# Altium PCB jsduino.PcbDoc
Units mm, origin at the board's own origin, x right, y up, seen from the top; angles counter-clockwise.
Board outline 102.23 x 53.34 mm, 2 copper layers (Top Layer, Bottom Layer); 61 components, 70 nets, 259 pads, 119 vias.
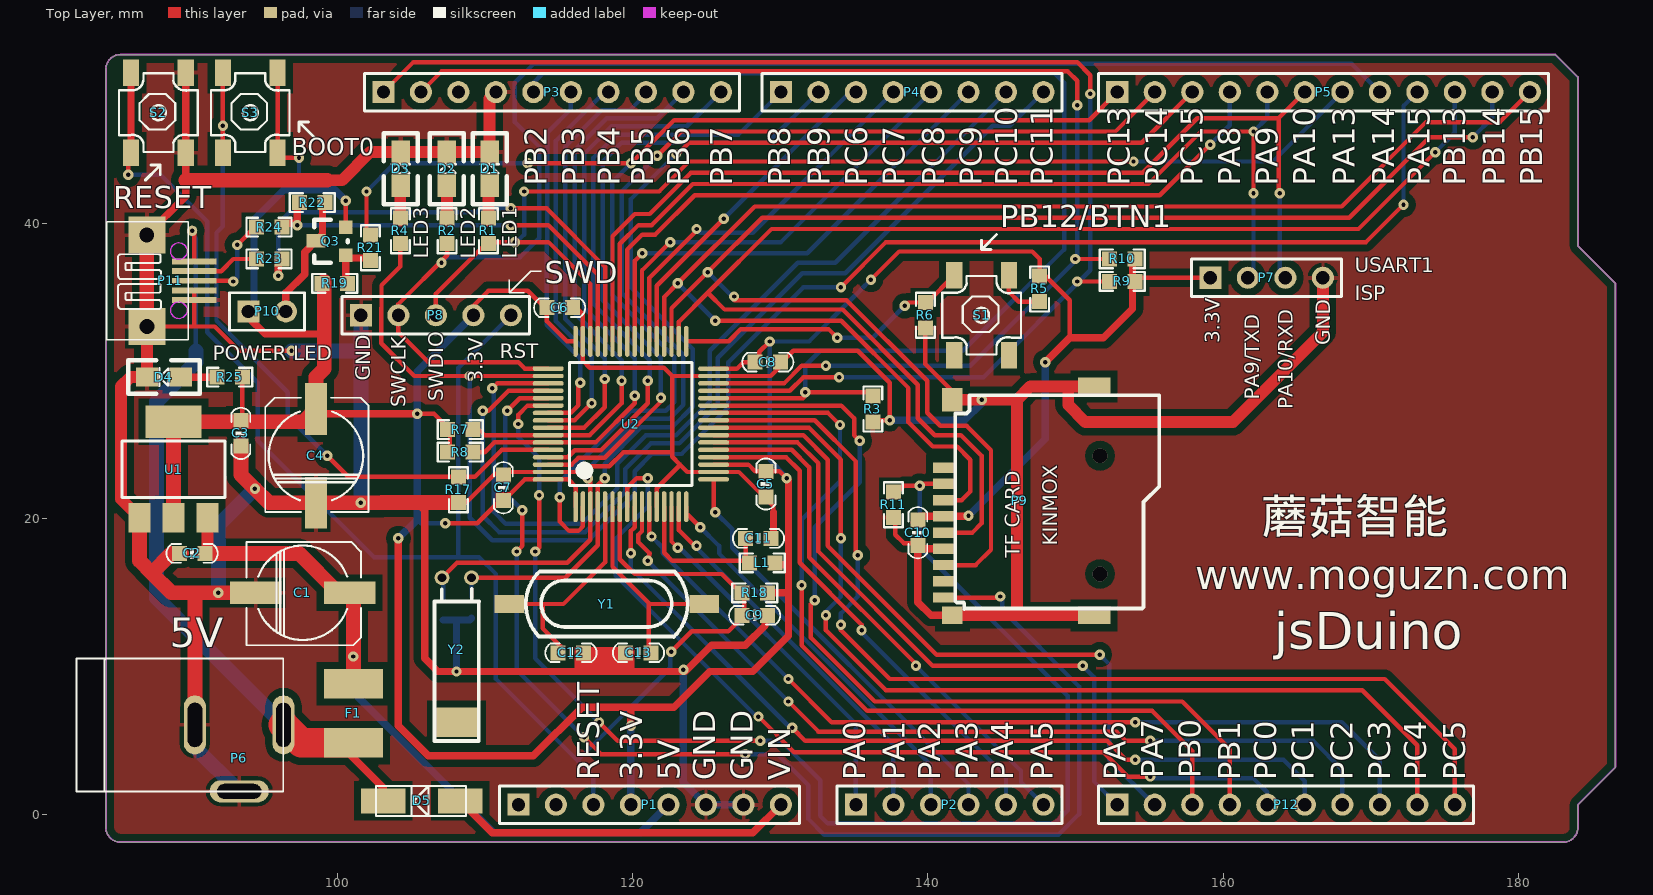
[diagram p0: Top Layer view]
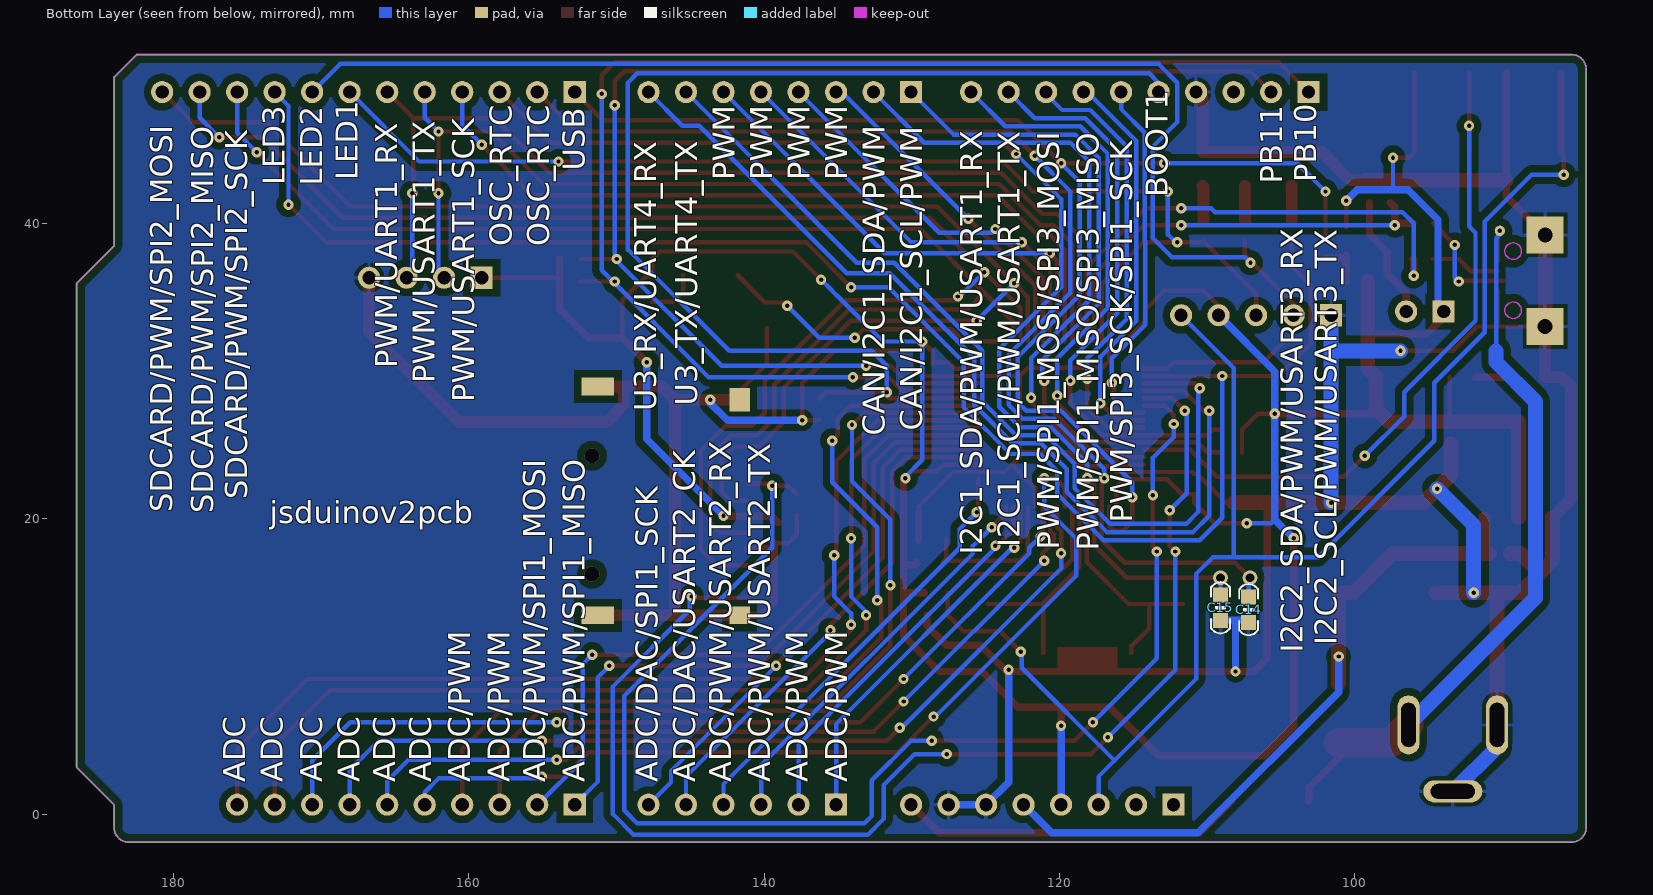
[diagram p1: Bottom Layer view, seen from below]

## Layer stack, top to bottom
Top Layer: signal copper 0.0356
Dielectric: dielectric 0.32, FR-4, Dk 4.8
Bottom Layer: signal copper 0.0356

## Board outline
84.328,-0.914 84.328,50.444 cw(c85.319,50.444) 85.319,51.435 182.499,51.435 184.023,49.911 184.023,38.481 186.563,35.941 186.563,3.175 184.023,0.635 184.023,-0.914 cw(c183.032,-0.914) 183.032,-1.905 85.319,-1.905 cw(c85.319,-0.914)

## Design rules (kind name [scope] priority, off if disabled: settings)
Clearance [All] p1: gap=0.5
PolygonConnect [All] p1: connectstyle=Relief reliefconductorwidth=0.254 reliefentries=4 polygonreliefangle="90 Angle" airgapwidth=0.254
RoutingVias [All] p1: holewidth=0.711 width=1.27 viastyle="Through Hole" minholewidth=0.711 minwidth=1.27 maxholewidth=0.711 maxwidth=1.27
SilkToSolderMaskClearance SilkscreenOverComponentPads [IsPad] p1: minsilkscreentomaskgap=0.254 clearancetoexposedcopper=TRUE
SolderMaskExpansion [All] p1: expansion=0.102
Width [All] p1: maxlimit=2 minlimit=0.254 preferedwidth=0.254 minimp=50.000000 maximp=50.000000 favimp=50.000000
27 further rules are at their usual default settings.

## Components (designator, comment, footprint, x,y, rotation, side; value= is the part's Value field where it differs from the comment)
C1 "1000uf" c6.3*5.3 97.663,14.986 r0 top
C2 "104" 0603CC 90.17,17.653 r180 top
C3 "104" 0603CC 93.472,25.781 r270 top
C4 "1000uf" c6.3*5.3 98.552,24.257 r90 top
C5 "Cap" 0603CC 129.032,22.352 r90 top
C6 "Cap" 0603CC 115.062,34.29 r180 top
C7 "Cap" 0603CC 111.252,22.098 r270 top
C8 "Cap" 0603CC 129.159,30.607 r180 top
C9 "Cap" 0603CC 128.27,13.462 r180 top
C10 "100nF" 0603CC 139.319,19.05 r90 top
C11 "Cap" 0603CC 128.524,18.669 r180 top
C12 "Cap" 0603CC 115.824,10.922 r0 top
C13 "Cap" 0603CC 120.396,10.922 r180 top
C14 "Cap" 0603CC 107.188,13.843 r270 bottom
C15 "Cap" 0603CC 109.093,13.97 r270 bottom
D1 "LED1" 0805LED 110.319,44.844 r270 top
D2 "LED1" 0805LED 107.423,44.844 r270 top
D3 "LED1" 0805LED 104.299,44.844 r270 top
D4 "LED1" 0805LED 87.122,29.591 r0 top
D5 "IN4007" DIODE_SS14 105.791,0.889 r0 top
F1 "500ma 5X5 1812" 1812R 101.092,4.826 r90 top
L1 "Inductor" 0603RR 128.778,17.018 r180 top
P1 "Header 8" HDR1X8 112.268,0.635 r0 top
P2 "Header 6" HDR1X6 135.128,0.635 r0 top
P3 "Header 10" HDR1X10 103.124,48.895 r0 top
P4 "Header 8" HDR1X8 130.048,48.895 r0 top
P5 "Header 12" HDR1X12 152.828,48.895 r0 top
P6 "Header 2" 5VINPUT 93.345,1.524 r180 top (schematic designator P2)
P7 "Header 4" HDR1X4 159.131,36.322 r0 top
P8 "SWD" HDR1X5 101.6,33.782 r0 top
P9 "microSD PUSH-PULL" TFCARD3 151.257,13.462 r90 top
P10 "Header 2" HDR1X2 93.98,34.036 r0 top
P11 "USBHOST" USB_mini 87.122,33.02 r90 top (schematic designator P1)
P12 "Header 10" HDR1X10 152.828,0.635 r0 top
Q3 "S9012" SOT-23 100.584,37.846 r90 top
R1 "1k" 0603RR 110.236,39.497 r270 top
R2 "1k" 0603RR 107.442,39.497 r270 top
R3 "Res2" 0603RR 136.271,27.432 r90 top
R4 "1k" 0603RR 104.267,39.497 r270 top
R5 "10K" 0603RR 147.574,35.56 r270 top
R6 "100K" 0603RR 139.827,33.782 r90 top
R7 "Res Semi" 0603RR 108.331,26.035 r0 top
R8 "Res Semi" 0603RR 108.331,24.511 r0 top
R9 "Res Semi" 0603RR 153.162,36.068 r180 top
R10 "Res Semi" 0603RR 153.162,37.592 r180 top
R11 "Res Semi" 0603RR 137.668,20.955 r270 top
R17 "Res2" 0603RR 108.204,21.971 r270 top
R18 "Res2" 0603RR 128.27,14.986 r180 top
R19 "Res Semi" 0603RR 99.822,35.941 r180 top
R21 "Res Semi" 0603RR 102.235,38.354 r270 top
R22 "Res Semi" 0603RR 98.298,41.402 r180 top
R23 "Res Semi" 0603RR 95.377,37.592 r0 top
R24 "Res Semi" 0603RR 95.377,39.751 r0 top
R25 "1k" 0603RR 92.71,29.591 r0 top
S1 "SW-PB" KEY_5*5*X 143.637,33.782 r90 top
S2 "SW-PB" KEY_5*5*X 87.884,47.498 r90 top
S3 "SW-PB" KEY_5*5*X 94.107,47.498 r90 top
U1 "SP1117" SOT-223 88.9,26.543 r0 top
U2 "STM32F103RBT6" LQFP64_M 119.888,26.416 r90 top
Y1 "8M" XTAL_smd1 118.237,14.224 r0 top
Y2 "32768" XTAL_32768_HH 108.077,16.002 r270 top

## Footprints (in the part's own frame and the unit in brackets; to place one, negate y for a bottom-side part, rotate by r counter-clockwise, add the part's x,y. Pads: shape width x height; smd on the part's side, far side on the other; paste and mask are expansions set on the pad)
5VINPUT [mm]
  oval 1.5x4 hole 1 slot 3 at 90 deg: 1(-3.013,-4.513) 2(2.987,-4.513)
  oval 4x1.5 hole 1 slot 3 at 0 deg: 3(-0.013,-0.013)
  silkscreen extent -3,-9 11,0
0603CC [mil]
  rect 40x40 smd: 1(-34,0) 2(34,0)
  silkscreen extent -68,-25 68,25
0603RR [mil]
  rect 40x40 smd: 1(-34,0) 2(34,0)
  silkscreen extent -60,-25 60,25
0805LED [mil]
  rect 60x50 smd: 1(90,0) 2(0,0)
  silkscreen extent -50,-45 140,45
1812R [mm]
  rect 2x4 smd: 1(0,0) 2(4,0)
c6.3*5.3 [mm]
  rect 3.5x1.5 smd: 1(3.175,0) 2(-3.175,0)
  silkscreen extent -3.81,-3.56 3.94,3.43
DIODE_SS14 [mm]
  rect 3x1.7 smd: 1(2.54,0) 2(-2.667,0)
  silkscreen extent -3.17,-1.02 2.92,1.02
HDR1X2 [mm] "Connector; Header; 2 Position"
  rect 1.5x1.5 hole 0.9: 1(0,0)
  round 1.5 hole 0.9: 2(2.54,0)
  silkscreen extent -1.27,-1.27 3.81,1.27
HDR1X4 [mm] "Connector; Header; 4 Position"
  rect 1.5x1.5 hole 0.9: 1(0,0)
  round 1.5 hole 0.9: 2(2.54,0) 3(5.08,0) 4(7.62,0)
  silkscreen extent -1.27,-1.27 8.89,1.27
HDR1X5 [mm] "Connector; Header; 5 Position"
  rect 1.5x1.5 hole 0.9: 1(0,0)
  round 1.5 hole 0.9: 2(2.54,0) 3(5.08,0) 4(7.62,0) 5(10.16,0)
  silkscreen extent -1.27,-1.27 11.43,1.27
HDR1X6 [mm] "Connector; Header; 6 Position"
  rect 1.5x1.5 hole 0.9: 1(0,0)
  round 1.5 hole 0.9: 2(2.54,0) 3(5.08,0) 4(7.62,0) 5(10.16,0) 6(12.7,0)
  silkscreen extent -1.27,-1.27 13.97,1.27
HDR1X8 [mm] "Connector; Header; 8 Position"
  rect 1.5x1.5 hole 0.9: 1(0,0)
  round 1.5 hole 0.9: 2(2.54,0) 3(5.08,0) 4(7.62,0) 5(10.16,0) 6(12.7,0) 7(15.24,0) 8(17.78,0)
  silkscreen extent -1.27,-1.27 19.05,1.27
HDR1X10 [mm] "Connector; Header; 10 Position"
  rect 1.5x1.5 hole 0.9: 1(0,0)
  round 1.5 hole 0.9: 2(2.54,0) 3(5.08,0) 4(7.62,0) 5(10.16,0) 6(12.7,0) 7(15.24,0) 8(17.78,0) 9(20.32,0) 10(22.86,0)
  silkscreen extent -1.27,-1.27 24.13,1.27
HDR1X12 [mm] "Connector; Header; 12 Position"
  rect 1.5x1.5 hole 0.9: 1(0,0)
  round 1.5 hole 0.9: 2(2.54,0) 3(5.08,0) 4(7.62,0) 5(10.16,0) 6(12.7,0) 7(15.24,0) 8(17.78,0) 9(20.32,0) 10(22.86,0) 11(25.4,0) 12(27.94,0)
  silkscreen extent -1.27,-1.27 29.21,1.27
KEY_5*5*X [mm]
  rect 1.8x1.1 smd: 1(-2.7,1.85) 1(2.7,1.85) 2(-2.7,-1.85) 2(2.7,-1.85)
  silkscreen extent -2.67,-2.67 2.67,2.67
LQFP64_M [mm]
  oval 2.1x0.3 smd: 1(-5.6,3.75) 2(-5.6,3.25) 3(-5.6,2.75) 4(-5.6,2.25) 5(-5.6,1.75) 6(-5.6,1.25) 7(-5.6,0.75) 8(-5.6,0.25) 9(-5.6,-0.25) 10(-5.6,-0.75) 11(-5.6,-1.25) 12(-5.6,-1.75) 13(-5.6,-2.25) 14(-5.6,-2.75) 15(-5.6,-3.25) 16(-5.6,-3.75) 33(5.6,-3.75) 34(5.6,-3.25) 35(5.6,-2.75) 36(5.6,-2.25) 37(5.6,-1.75) 38(5.6,-1.25) 39(5.6,-0.75) 40(5.6,-0.25) 41(5.6,0.25) 42(5.6,0.75) 43(5.6,1.25) 44(5.6,1.75) 45(5.6,2.25) 46(5.6,2.75) 47(5.6,3.25) 48(5.6,3.75)
  oval 0.3x2.1 smd: 17(-3.75,-5.6) 18(-3.25,-5.6) 19(-2.75,-5.6) 20(-2.25,-5.6) 21(-1.75,-5.6) 22(-1.25,-5.6) 23(-0.75,-5.6) 24(-0.25,-5.6) 25(0.25,-5.6) 26(0.75,-5.6) 27(1.25,-5.6) 28(1.75,-5.6) 29(2.25,-5.6) 30(2.75,-5.6) 31(3.25,-5.6) 32(3.75,-5.6) 49(3.75,5.6) 50(3.25,5.6) 51(2.75,5.6) 52(2.25,5.6) 53(1.75,5.6) 54(1.25,5.6) 55(0.75,5.6) 56(0.25,5.6) 57(-0.25,5.6) 58(-0.75,5.6) 59(-1.25,5.6) 60(-1.75,5.6) 61(-2.25,5.6) 62(-2.75,5.6) 63(-3.25,5.6) 64(-3.75,5.6)
  silkscreen extent -4.15,-4.15 4.15,4.15
SOT-23 [mil]
  rect 36x36 smd: 1(0,0) 2(75,0)
  rect 36x50 smd: 3(38,80)
  silkscreen extent -20,-5 95,85
SOT-223 [mm]
  rect 1.5x2 smd: 1(-2.289,-6.468) 2(0.011,-6.468) 3(2.311,-6.468)
  rect 3.8x2.2 smd: 2(0.011,0.032)
  silkscreen extent -3.49,-5.12 3.51,-1.27
TFCARD3 [mm]
  rect 0.7x1.6 smd: 1(10,10.1) 2(8.9,10.1) 3(7.8,10.1) 4(6.7,10.1) 5(5.6,10.1) 6(4.5,10.1) 7(3.4,10.1) 8(2.3,10.1) 9(1.2,10.1)
  rect 1.2x1.4 all layers, no hole: 10(0,9.6)
  rect 1.2x2.2 all layers, no hole: 10(0,0) 10(15.5,0)
  rect 1.6x1.4 all layers, no hole: 10(14.6,9.6)
  silkscreen extent 0.41,-4.42 14.9,9.4
USB_mini [mm]
  rect 0.4x3 smd: 1(4.4,-3.187) 2(3.75,-3.187) 3(3.1,-3.187) 4(2.45,-3.187) 5(1.8,-3.187)
  rect 2.5x2.5 hole 1: 5(0,0) 5(6.2,0.02)
  Keep-Out Layer circle w0.1: c1.1,-2.15 r0.56
  Keep-Out Layer circle w0.1: c5.1,-2.15 r0.563
  silkscreen extent -0.91,-2.79 7.1,2.75
XTAL_32768_HH [mm]
  round 1 hole 0.6: 1(0,-0.984) 2(0,1.016)
  rect 2x3 smd: 3(9.779,0)
  silkscreen extent 0.76,-1.48 11.05,1.52
XTAL_smd1 [mm]
  rect 2x1.2 smd: 1(-6.604,0) 2(6.604,0)
  silkscreen extent -5.47,-2.22 5.49,2.22

## Part data
C1 C4: library part "CAPACITOR POL", "Capacitor"
C2 C3: library part CAP, "Capacitor"
C5 C6 C7 C8 C9 C11 C12 C13 C14 C15: "Capacitor"
C10: library part CAP
D1 D2 D3 D4: library part LED
D5: library part Diode, "Default Diode"
F1: library part "Fuse 2", "Fuse"
P1 P4: "Header, 8-Pin"
P2: "Header, 6-Pin"
P3 P12: "Header, 10-Pin"
P5: "Header, 12-Pin"
P6 P10: "Header, 2-Pin"
P7: "Header, 4-Pin"
P8 P11: library part "Header 5", "Header, 5-Pin"
Q3: "PNP General Purpose Amplifier"
R1 R2 R4 R5 R6 R25: library part RES1
R3 R17 R18: "Resistor"
R7 R8 R9 R10 R11 R19 R21 R22 R23 R24: "Semiconductor Resistor"
U2: "STM32 ARM-based 32-bit MCU with 128 Kbytes Flash, 64-pin LQFP, Industrial Temperature"
Y1 Y2: library part XTAL, "Crystal Oscillator"

## Free pads (board coordinates)
  round 0.7 hole 0.3: 0(90.17,39.497)

## Via types
v1: diameter 0.7, hole 0.3, Top Layer to Bottom Layer, 117 vias
v2: diameter 1, hole 1, Top Layer to Bottom Layer, 2 vias

## Nets (pads, with @x,y where several pads share a name; then routed paths per layer and width w, separated by ;. In a path a pad name is that pad's centre, name@x,y a point inside that pad or via, vN(x,y) a via of type N, cw(c..) or ccw(c..) an arc to the next point about the centre after c; other vN are vias at no path point)
+3.3V: C3.1 C4.1 C5.2 C6.2 C7.2 C8.2 C10.2 L1.1 P1.4 P7.1 P8.4 P9.4 P10.1 Q3.2 R5.1 R7.1 R8.1 R9.1 R10.1 R18.1 R19.2 R25.2 S3.2 U1.2 U2.1 U2.19 U2.32 U2.48 U2.64 | length 254.8
  Top Layer w0.3: C3.1 93.574,26.746 R25.2 ; S3.2@95.957,50.198 95.957,44.798 96.305,44.45 v1(97.409,44.45) ; Q3.2 v1(100.584,41.529) v1@100.584,41.656 ; v1(105.41,27.114) 106.553,27.114 107.632,26.035 R8.1@107.632,24.511 ; v1(107.315,19.685) 109.474,19.685 110.871,21.082 110.871,21.653 111.697,21.653 112.709,22.666 U2.64 115.637,22.666 116.138,22.165 U2.1 ; P8.4 109.22,34.417 110.236,35.433 112.903,35.433 114.198,34.138 114.198,33.376 115.558,32.016 U2.48 ; U2.19 127.845,23.666 128.295,23.216 129.946,23.216 v1(130.429,22.733) ; U2.32 127.067,30.166 127.508,30.607 C8.2 ; C8.2@128.588,30.48 128.588,31.305 v1(129.286,32.004) ; v1(136.144,36.195) 138.049,38.1 147.066,38.1 147.574,37.592 R5.1 147.98,36.424 149.606,34.798 149.606,32.258 ; R9.1@153.861,36.068 154.114,36.322 P7.1
  Top Layer w0.5: P10.1 93.98,33.655 95.123,32.512 99.123,32.512 ; C4.1 98.87,27.114 v1(105.41,27.114) ; v1(104.14,18.669) 104.14,5.969 106.172,3.937 113.284,3.937 116.586,7.239 119.888,7.239 ; P1.4 P1.4@119.888,1.143 ; v1(119.888,5.969) 119.888,7.239 ; R18.1 130.556,14.986 ; L1.1 129.769,16.891 130.556,16.891 ; v1(130.429,22.733) 130.556,22.606 130.556,16.891 ; C10.2@139.065,19.748 139.478,20.162 P9.4 142.717,20.162 v1(142.748,20.193) ; v1(147.955,30.607) 149.606,32.258 151.892,32.258 153.861,34.227 153.861,36.068 R10.1@153.861,37.592 ; 119.888,7.239 122.809,7.239 125.222,9.652 128.143,9.652 130.556,12.065 130.556,14.986 ; 130.556,14.986 130.556,16.891
  Top Layer w1: U1.2@88.911,20.075 88.911,26.575 97.695,26.575 C4.1 98.552,29.591 99.123,30.162 99.123,32.512 R19.2@99.123,36.068
  Bottom Layer w0.3: 97.409,42.291 v1(97.409,44.45) ; 105.41,19.939 105.664,19.685 v1(107.315,19.685) ; v1(130.429,22.733) 130.429,22.86 129.286,24.003 v1(129.286,32.004) 131.953,32.004 135.082,35.133 135.103,35.133 135.428,35.458 135.428,35.479 v1(136.144,36.195)
  Bottom Layer w0.5: P10.1 94.361,34.417 94.361,40.259 96.393,42.291 97.409,42.291 99.822,42.291 v1(100.584,41.529) ; v1(104.14,18.669) 105.41,19.939 v1(105.41,27.114) 105.41,29.972 P8.4 ; P1.4 v1(119.888,5.969) ; v1(142.748,20.193) 147.955,25.4 v1(147.955,30.607)
+5V: C1.1 C2.1 F1.2 P1.5 U1.3 | length 48.4
  Top Layer w0.8: C2.1@90.868,17.653 91.211,17.996 U1.3
  Top Layer w1: C2.1@90.868,17.653 97.409,17.653 100.076,14.986 C1.1 101.092,14.732 v1(101.092,10.668) F1.2
  Bottom Layer w0.5: v1(101.092,10.668) 101.092,8.255 110.617,-1.27 120.523,-1.27 P1.5
AREF: P3.3
BOOT0: R17.1 S3.1 U2.60 | length 47.4
  Top Layer w0.3: S3.1@92.257,44.798 v1(92.257,46.609) S3.1@92.257,50.198 ; v1(99.314,24.257) 100.736,22.835 R17.1 109.322,22.835 111.153,24.666 U2.60
  Bottom Layer w0.3: v1(92.257,46.609) 92.257,39.806 91.821,39.37 91.821,33.401 96.647,28.575 96.647,26.924 v1(99.314,24.257)
GND: C1.2 C2.2 C3.2 C4.2 C5.1 C6.1 C7.1 C8.1 C9.1 C10.1 C11.1 C12.2 C13.2 C14.2 C15.2 D1.2 D2.2 D3.2 D4.2 P1.6 P1.7 P3.4 P6.2 P6.3 P7.4 P8.1 P9.6 P11.4 P11.5 R3.1 R6.1 R11.2 R17.2 S2.2 U1.1 U2.12 U2.18 U2.31 U2.47 U2.63 | length 351.1
  Top Layer w0.3: P11.5@87.122,33.02 90.424,33.02 ; P11.4 90.309,34.82 90.309,33.135 90.424,33.02 ; v1(96.901,31.369) 93.345,31.369 91.694,33.02 90.424,33.02 ; R17.2@108.077,21.082 108.712,21.082 110.68,23.05 110.871,23.05 110.986,23.166 U2.63 116.13,23.166 116.522,23.558 118.427,23.558 119.38,24.511 122.682,24.511 ; C6.1@115.824,34.29 116.205,34.29 116.638,33.857 U2.47 116.638,30.682 117.094,30.226 122.122,30.226 122.682,29.666 ; U2.12 121.638,22.07 123.196,23.628 123.196,23.68 ; 129.54,20.447 129.54,20.828 127.202,23.166 U2.18 123.71,23.166 123.196,23.68 ; R3.1@136.271,26.733 136.334,26.67 v1(137.414,26.67) ; v1@137.414,26.543 v1(137.414,26.67) ; R11.2@137.795,20.256 137.795,18.923 138.367,18.351 C10.1@139.319,18.351 ; R6.1 139.827,30.48 141.657,28.65 141.657,28.062 ; 144.272,28.062 144.335,28.125 ; 122.682,24.511 122.682,29.666 ; 122.682,24.511 122.682,24.194 123.196,23.68 ; 122.682,29.666 U2.31 129.361,29.666 129.984,30.29 129.984,30.48 130.874,31.369 135.255,31.369 137.414,29.21 v1(137.414,26.67)
  Top Layer w0.5: P11.5@87.102,39.22 89.734,41.853 89.734,42.926 89.734,44.798 S2.2@89.734,50.198 ; 105.41,21.082 105.918,20.574 105.918,10.541 106.807,9.652 v1(108.077,9.652) 123.571,9.652 125.349,11.43 127.635,11.43 128.969,12.763 C9.1@128.969,13.462 ; C11.1@129.54,18.542 129.54,20.447 ; C10.1@139.319,18.351 C10.1@139.319,18.098 ; P9.6 139.454,17.962 C10.1@139.319,18.098 ; 141.657,13.462 140.208,13.462 139.319,14.351 C10.1@139.319,18.098
  Top Layer w0.8: U1.1 85.344,21.342 85.344,28.956 85.979,29.591 D4.2 P11.5@87.122,33.02 ; 99.314,42.926 100.33,42.926 102.248,44.844 D3.2 D2.2 D1.2 110.319,48.47 P3.4 ; C12.2@116.522,10.922 C13.2@119.697,10.922 ; 141.657,13.462 146.05,13.462 ; 141.657,28.062 v1(143.637,28.062) 144.272,28.062 146.045,28.062 ; 151.257,13.462 146.05,13.462 ; 151.257,28.962 149.479,28.962 ; P7.4 166.751,32.639 160.655,26.543 150.668,26.543 149.503,27.708 149.503,28.938 149.479,28.962 ; 146.045,28.062 146.945,28.962 149.479,28.962 ; 146.045,28.062 146.045,13.467 146.05,13.462
  Top Layer w1: U1.1 86.611,17.148 87.439,16.319 ; P11.5@87.102,39.22 87.102,33.04 P11.5@87.122,33.02 ; C2.2@89.471,17.653 88.773,17.653 87.439,16.319 ; 89.734,42.926 99.314,42.926 ; P6.2 90.358,14.666 90.678,14.986 ; C3.2@93.472,25.082 93.472,22.987 v1(94.424,22.034) 95.377,21.082 C4.2 102.997,21.082 103.022,21.107 R17.2 ; C1.2 v1(91.948,14.986) 90.678,14.986 ; 87.439,16.319 88.773,14.986 90.678,14.986
  Bottom Layer w0.5: C14.2@107.188,13.144 108.077,13.144 ; v1(108.077,9.652) 108.077,13.144 ; C15.2@109.093,13.271 108.966,13.144 108.077,13.144 ; v1(123.444,9.779) 123.444,2.159 P1.6 P1.7 ; v1(137.414,26.67) 142.478,26.67 143.637,27.829 v1(143.637,28.062)
  Bottom Layer w1: P6.2 90.358,4.537 P6.3 ; v1(91.948,14.986) 91.948,19.558 v1(94.424,22.034) ; v1(96.901,31.369) 101.473,31.369 ; v1(101.6,21.082) P8.1
IOREF: P1.2
NetC11_2: C11.2 L1.2 U2.13 | length 10.8
  Top Layer w0.3: U2.13 122.138,17.689 122.682,17.145 L1.2@127.787,17.145 ; C11.2 127.66,17.272 L1.2@127.787,17.145 ; L1.2 L1.2@127.787,17.145
NetD1_1: D1.1 R1.1 | length 2.4
  Top Layer w0.8: R1.1@110.236,40.195 110.236,42.475 D1.1
NetD2_1: D2.1 R2.1 | length 2.4
  Top Layer w0.8: D2.1 107.442,42.539 R2.1@107.442,40.195
NetD3_1: D3.1 R4.1 | length 2.4
  Top Layer w0.8: R4.1@104.267,40.195 104.267,42.526 D3.1
NetD4_1: D4.1 R25.1 | length 2.4
  Top Layer w0.5: D4.1 R25.1
NetP10_2: P10.2 Q3.3 R22.1 | length 8.4
  Top Layer w0.5: P10.2 96.52,35.292 97.79,36.562 97.79,38.049 Q3.3 98.996,39.256 R22.1@98.996,41.402
NetP11_2: P11.2 R23.1 | length 4.7
  Top Layer w0.3: P11.2 92.142,36.77 92.964,37.592 R23.1@94.678,37.592
NetP11_3: P11.3 R24.1 | length 7.8
  Top Layer w0.3: P11.3@89.928,36.12 P11.3 v1@93.039,36.12 ; v1@93.218,38.481 v1(93.218,38.544) R24.1@94.678,40.005
  Bottom Layer w0.3: v1(92.964,36.068) 93.218,36.322 v1(93.218,38.544)
NetQ3_1: Q3.1 R19.1 R21.2 | length 3.3
  Top Layer w0.5: R19.1@100.52,36.068 100.584,36.131 Q3.1 100.774,37.655 R21.2@101.981,37.655
NetR5_2: R5.2 S1.2@145.487,36.482 | length 3.5
  Top Layer w0.3: S1.2@145.487,36.482 145.487,35.361 146.152,34.696 R5.2
OSCIN: C12.1 U2.5 Y1.1 | length 15.2
  Top Layer w0.3: Y1.1 113.919,14.224 ; C12.1@115.126,10.922 115.126,11.367 113.919,12.573 113.919,14.224 ; U2.5 118.138,17.046 115.316,14.224 113.919,14.224
OSCOUT: C13.1 U2.6 Y1.2 | length 14.6
  Top Layer w0.3: U2.6 118.638,16.744 121.158,14.224 ; C13.1@121.094,10.922 121.094,14.16 121.158,14.224 ; Y1.2 121.158,14.224
PA0: P2.1 U2.14 | length 25.4
  Top Layer w0.3: U2.14 122.638,18.459 v1(123.063,18.034)
  Bottom Layer w0.3: v1(123.063,18.034) 123.19,18.034 135.128,6.096 P2.1
PA1: P2.2 U2.15 | length 26.3
  Top Layer w0.3: U2.15 123.138,19.229 124.206,18.161 v1(124.333,18.161)
  Bottom Layer w0.3: v1(124.333,18.161) 124.333,18.034 137.668,4.699 P2.2
PA2: P2.3 U2.16 | length 27
  Top Layer w0.3: U2.16 123.638,20.38 v1(124.587,19.431)
  Bottom Layer w0.3: v1(124.587,19.431) 125.857,18.161 125.857,17.653 140.208,3.302 P2.3
PA3: P2.4 U2.17 | length 29.2
  Top Layer w0.3: U2.17 125.488,20.562 v1(125.603,20.447)
  Bottom Layer w0.3: v1(125.603,20.447) 126.746,19.304 126.746,18.034 142.748,2.032 P2.4
PA4: P2.5 U2.20 | length 34.6
  Top Layer w0.3: U2.20 130.393,24.166 131.318,23.241 131.318,17.018 135.509,12.827 v1(135.509,12.446)
  Bottom Layer w0.3: v1(135.509,12.446) 135.509,12.319 145.288,2.54 P2.5
PA5: P2.6 U2.21 | length 36.3
  Top Layer w0.3: U2.21 130.782,24.666 131.953,23.495 131.953,17.399 v1@139.192,10.16
  Bottom Layer w0.3: v1(139.192,10.033) 146.304,2.921 146.304,2.159 P2.6
PA6: P12.1 U2.22 | length 45.1
  Top Layer w0.3: U2.22 131.171,25.166 132.588,23.749 132.588,17.78 140.335,10.033 v1(150.495,10.033)
  Bottom Layer w0.3: v1(150.495,10.033) 151.257,9.271 151.257,2.206 P12.1
PA7: P12.2 U2.23 | length 47.5
  Top Layer w0.3: U2.23 131.56,25.666 133.223,24.003 133.223,18.161 140.589,10.795 v1(151.638,10.795)
  Bottom Layer w0.3: v1(151.638,10.795) 152.273,10.16 152.273,3.683 155.321,0.635 P12.2
PA8: P5.4 U2.41 | length 52.8
  Top Layer w0.3: U2.41 119.638,38.231 120.65,39.243 121.539,39.243 124.206,41.91 155.702,41.91 v1(159.131,45.339)
  Bottom Layer w0.3: v1(159.131,45.339) 160.448,46.656 P5.4
PA9_TXD1: P5.5 P7.2 U2.42 | length 65.8
  Top Layer w0.3: U2.42 119.138,38.62 120.407,39.889 121.296,39.889 124.079,42.672 154.94,42.672 158.496,46.228 v1(162.052,46.228) v1(162.052,42.037)
  Bottom Layer w0.3: P7.2 162.052,36.703 v1(162.052,42.037) ; v1(162.052,46.228) 162.988,47.164 P5.5
PA10_RXD1: P5.6 P7.3 U2.43 | length 69
  Top Layer w0.3: U2.43 118.638,39.136 120.142,40.64 121.158,40.64 123.952,43.434 154.559,43.434 158.242,47.117 163.75,47.117 ; v1(163.83,42.037) 163.75,42.117 163.75,47.117 ; P5.6 163.75,47.117
  Bottom Layer w0.3: v1(163.83,42.037) 163.83,36.703 P7.3
PA11_D-: R23.2 U2.44 | length 34
  Top Layer w0.3: v1(111.76,41.021) 114.173,41.021 118.138,37.056 U2.44
  Top Layer w0.5: v1(96.012,36.449) 96.012,37.529 R23.2@96.075,37.592
  Bottom Layer w0.3: v1(96.012,36.449) 96.012,40.005 96.774,40.767 109.474,40.767 109.728,41.021 v1(111.76,41.021)
PA12_D+: R22.2 R24.2 U2.45 | length 29.2
  Top Layer w0.3: v1(111.76,39.878) 114.3,39.878 117.638,36.54 U2.45
  Top Layer w0.5: R24.2@96.075,40.005 97.155,40.005 v1(97.282,39.878) 97.282,41.084 R22.2@97.599,41.402
  Bottom Layer w0.3: v1(97.282,39.878) v1(111.76,39.878)
PA13_SWDIO: P5.7 P8.3 R1.2 U2.46 | length 80.5
  Top Layer w0.3: P8.3 106.68,35.242 110.236,38.798 110.299,38.735 v1(112.014,38.735) 114.3,38.735 117.138,35.897 U2.46 ; v1(112.649,42.164) 121.793,42.164 123.825,44.196 v1(153.924,44.196)
  Bottom Layer w0.3: v1@112.014,38.608 112.649,39.243 v1(112.649,42.164) ; v1(153.924,44.196) 163.369,44.196 P5.7
PA14_SWCLK: P5.8 P8.2 R2.2 U2.49 | length 97.1
  Top Layer w0.3: R2.2@107.442,38.798 107.442,37.846 104.14,34.544 P8.2 104.14,32.639 106.172,30.607 112.268,30.607 112.709,30.166 U2.49
  Bottom Layer w0.3: v1(107.061,37.338) 107.442,37.719 112.395,37.719 113.665,38.989 113.665,45.212 112.014,46.863 112.014,49.53 113.284,50.8 168.703,50.8 P5.8
PA15: P5.9 R4.2 U2.50 | length 113.3
  Top Layer w0.3: R4.2@104.267,38.798 104.267,37.084 102.997,35.814 102.997,34.282 102.986,34.271 102.986,31.888 105.208,29.666 v1(108.966,29.666) U2.50 ; v1(134.112,35.687) 137.16,38.735 169.672,38.735 v1(172.212,41.275)
  Bottom Layer w0.3: v1(108.966,29.666) 108.966,20.066 110.49,18.542 117.01,18.542 120.142,21.674 120.142,23.22 121.306,24.384 123.317,24.384 126.492,27.559 126.492,30.607 131.572,35.687 v1(134.112,35.687) ; v1(172.212,41.275) 172.212,47.959 P5.9
PB0: P12.3 U2.26 | length 58
  Top Layer w0.3: U2.26 133.235,27.166 v1(134.048,26.352) ; v1(131.445,15.494) 131.445,11.43 135.89,6.985 155.194,6.985 157.908,4.271 P12.3
  Bottom Layer w0.3: v1(131.445,15.494) 131.445,19.939 134.048,22.543 v1(134.048,26.352)
PB1: P12.4 U2.27 | length 61.5
  Top Layer w0.3: U2.27 134.132,27.666 135.001,26.797 135.001,25.654 v1(135.382,25.273) ; v1(132.334,14.478) 132.08,14.224 132.08,11.938 136.398,7.62 157.226,7.62 160.448,4.398 P12.4
  Bottom Layer w0.3: v1(132.334,14.478) 132.334,19.431 135.382,22.479 v1(135.382,25.273)
PB2: P3.5 R3.2 U2.28 | length 82.1
  Top Layer w0.3: U2.28 131.544,28.166 131.953,28.575 135.826,28.575 R3.2@136.271,28.13
  Bottom Layer w0.3: P3.5 113.284,49.53 113.919,50.165 148.59,50.165 149.225,49.53 149.225,38.227 142.367,31.369 132.715,31.369 131.699,30.353 v1(131.699,28.575)
PB3_SPI1SCK: P3.6 U2.55 | length 25.2
  Top Layer w0.3: U2.55 115.812,27.166 116.332,27.686 116.332,29.083 v1(116.459,29.21)
  Bottom Layer w0.3: P3.6 115.824,47.752 114.219,46.147 114.219,38.76 114.173,38.714 114.173,33.147 116.459,30.861 v1(116.459,29.21)
PB4_SPI1MISO: P3.7 U2.56 | length 27.1
  Top Layer w0.3: U2.56 116.074,26.666 v1(117.221,27.813)
  Bottom Layer w0.3: v1(117.221,27.813) 117.221,30.967 114.808,33.38 114.808,45.593 118.11,48.895 P3.7
PB5_SPI1MOSI: P3.8 U2.57 | length 30.2
  Top Layer w0.3: U2.57 116.717,26.166 118.11,27.559 v1(118.11,29.464)
  Bottom Layer w0.3: v1(118.11,29.464) 118.11,30.861 115.443,33.528 115.443,45.212 117.913,47.682 119.818,47.682 120.904,48.768 P3.8
PB6_I2C1SCL: P3.9 R7.2 U2.58 | length 38.7
  Top Layer w0.3: R7.2@109.029,26.035 109.601,26.035 109.97,25.666 U2.58 117.106,25.666 119.253,27.813 v1(119.253,29.337)
  Bottom Layer w0.3: v1(119.253,29.337) 119.253,30.734 116.078,33.909 116.078,44.958 118.248,47.128 121.677,47.128 P3.9
PB7_I2C1SDA: P3.10 R8.2 U2.59 | length 41.8
  Top Layer w0.3: R8.2@109.029,24.511 109.982,24.511 110.637,25.166 U2.59 117.495,25.166 120.142,27.813 v1(120.142,28.321)
  Bottom Layer w0.3: v1(120.142,28.321) 120.142,30.861 116.713,34.29 116.713,44.704 118.583,46.574 123.663,46.574 P3.10
PB8: P4.1 U2.61 | length 41.1
  Top Layer w0.3: U2.61 115.606,24.166 116.078,24.638 117.856,24.638 121.031,27.813 121.031,29.083 v1@121.158,29.21
  Bottom Layer w0.3: v1@121.158,29.21 121.158,30.734 117.348,34.544 117.348,44.45 118.918,46.02 127.173,46.02 P4.1
  other v1: 121.031,29.337
PB9: P4.2 U2.62 | length 43.8
  Top Layer w0.3: U2.62 115.868,23.666 116.332,24.13 118.11,24.13 121.92,27.94 v1(121.92,28.194)
  Bottom Layer w0.3: v1(121.92,28.194) 121.92,30.861 117.983,34.798 117.983,44.196 119.253,45.466 129.159,45.466 P4.2
PB10_I2C2SCL: P3.1 R9.2 U2.29 | length 93.5
  Top Layer w0.3: P3.1 105.156,50.927 150.114,50.927 151.003,50.038 v1(151.003,48.768) ; U2.29 130.647,28.666 131.572,29.591 v1(133.985,29.591) ; v1(150.114,36.068) R9.2@152.463,36.068
  Bottom Layer w0.3: v1(133.985,29.591) 143.764,29.591 151.003,36.83 v1(151.003,48.768)
PB11_I2C2SDA: P3.2 R10.2 U2.30 | length 87.9
  Top Layer w0.3: P3.2 107.061,50.292 149.479,50.292 150.114,49.657 v1(150.114,48.006) ; U2.30 130.258,29.166 131.445,30.353 v1(133.096,30.353) ; v1(149.987,37.592) R10.2@152.463,37.592
  Bottom Layer w0.3: v1(133.096,30.353) 142.875,30.353 150.114,37.592 v1(150.114,48.006)
PB12: R6.2 S1.1@141.787,36.482 U2.33 | length 20.5
  Top Layer w0.3: U2.33 126.504,32.016 127.335,32.847 133.269,32.847 v1(133.858,32.258) ; v1(138.43,34.417) 138.659,34.646 R6.2 139.951,34.646 S1.1@141.787,36.482
  Bottom Layer w0.3: v1(133.858,32.258) 136.271,32.258 v1(138.43,34.417)
PB13_SPI2CLK: P5.10 P9.5 U2.34 | length 93.7
  Top Layer w0.3: U2.34 123.138,33.349 125.095,35.306 ; P9.5 143.014,19.062 143.637,19.685 143.637,24.257 142.24,25.654 140.462,25.654 139.319,26.797 139.319,29.083 134.231,34.171 126.23,34.171 125.095,35.306 ; v1(174.371,44.831) 169.164,39.624 129.413,39.624 125.095,35.306
  Bottom Layer w0.3: v1(174.371,44.831) 175.688,46.148 P5.10
PB14_SPI2MISO: P5.11 P9.7 U2.35 | length 100.6
  Top Layer w0.3: U2.35 122.638,34.246 v1(125.095,36.703) 128.778,40.386 168.529,40.386 173.99,45.847 176.784,45.847 v1@176.911,45.72 ; v1@126.873,34.798 134.493,34.798 139.954,29.337 139.954,27.178 140.843,26.289 142.621,26.289 144.272,24.638 144.272,17.907 143.227,16.862 P9.7
  Bottom Layer w0.3: v1(125.095,36.703) v1@126.873,34.925 ; v1(176.911,45.847) 178.228,47.164 P5.11
  other v1: 126.873,35.052
PB15_SPI2MOSI: P5.12 P9.3 U2.36 | length 97.6
  Top Layer w0.3: U2.36 122.138,35.016 v1(123.063,35.941) 128.27,41.148 168.021,41.148 173.736,46.863 178.736,46.863 P5.12 ; v1(125.603,33.401) 134.133,33.401 138.684,28.85 138.684,26.543 140.335,24.892 141.986,24.892 142.875,24.003 142.875,21.844 142.293,21.262 P9.3
  Bottom Layer w0.3: v1(123.063,35.941) v1(125.603,33.401)
PC0: P12.5 U2.8 | length 61.5
  Top Layer w0.3: U2.8 119.638,22.102 120.269,22.733 v1(121.031,22.733) ; v1(128.524,6.604) 130.937,4.191 151.892,4.191 153.543,2.54 v1(155.067,2.54)
  Bottom Layer w0.3: v1(121.031,22.733) 121.031,20.828 118.872,18.669 118.872,16.129 v1@128.46,6.54 ; v1@154.94,2.413 162.052,2.413 162.988,1.477 P12.5
PC1: P12.6 U2.9 | length 57.5
  Top Layer w0.3: v1(119.888,17.653) 119.888,19.177 120.138,19.427 U2.9 ; v1(130.81,5.842) 131.699,4.953 152.146,4.953 153.416,3.683 v1(154.051,3.683)
  Bottom Layer w0.3: v1(119.888,17.653) 119.888,16.637 v1@130.81,5.715 ; v1(154.051,3.683) 164.084,3.683 165.528,2.239 P12.6
PC2: P12.7 U2.10 | length 59.5
  Top Layer w0.3: U2.10 120.638,19.165 120.396,18.923 120.396,18.415 121.158,17.653 v1(121.031,17.145) ; v1(130.556,7.62) 132.588,5.588 152.781,5.588 153.416,4.953 v1(155.067,4.953)
  Bottom Layer w0.3: v1(121.031,17.145) v1(130.556,7.62) v1@130.619,7.556 ; v1(155.067,4.953) 166.116,4.953 168.068,3.001 P12.7
PC3: P12.8 U2.11 | length 60.9
  Top Layer w0.3: U2.11 121.138,18.943 v1(121.285,18.796) ; v1(130.556,9.144) 133.477,6.223 v1(154.051,6.223)
  Bottom Layer w0.3: v1(121.285,18.796) 122.047,18.034 122.047,17.653 v1(130.556,9.144) ; v1(154.051,6.223) 168.021,6.223 170.608,3.636 P12.8
PC4: P12.9 U2.24 | length 68.8
  Top Layer w0.3: U2.24 131.949,26.166 134.112,24.003 v1(134.112,18.669) ; v1(133.096,13.462) 133.096,12.446 137.16,8.382 169.418,8.382 173.148,4.652 P12.9
  Bottom Layer w0.3: v1(133.096,13.462) 133.096,13.716 134.112,14.732 v1(134.112,18.669)
PC5: P12.10 U2.25 | length 71.4
  Top Layer w0.3: U2.25 132.338,26.666 135.128,23.876 135.128,17.653 v1(135.255,17.526) ; v1(134.112,12.827) 134.112,12.446 137.414,9.144 170.942,9.144 175.688,4.398 P12.10
  Bottom Layer w0.3: v1(134.112,12.827) 134.112,13.589 135.255,14.732 v1(135.255,17.526)
PC6: P4.3 U2.37 | length 22.7
  Top Layer w0.3: U2.37 121.638,35.786 v1(126.174,40.322)
  Bottom Layer w0.3: v1(126.174,40.322) 134.747,48.895 P4.3
PC7: P4.4 U2.38 | length 26.3
  Top Layer w0.3: U2.38 121.138,36.302 124.333,39.497 v1(124.333,39.624)
  Bottom Layer w0.3: v1(124.333,39.624) 124.587,39.37 128.143,39.37 P4.4
PC8: P4.5 U2.39 | length 29.4
  Top Layer w0.3: U2.39 120.638,36.818 v1(122.555,38.735)
  Bottom Layer w0.3: v1(122.555,38.735) 130.048,38.735 P4.5
PC9: P4.6 U2.40 | length 32.8
  Top Layer w0.3: U2.40 120.138,37.461 v1(120.65,37.973)
  Bottom Layer w0.3: v1(120.65,37.973) 131.826,37.973 P4.6
PC10_TXD3: P4.7 U2.51 | length 62.7
  Top Layer w0.3: v1(110.49,28.829) 110.827,29.166 U2.51
  Bottom Layer w0.3: v1(110.49,28.829) 110.609,28.71 110.609,20.455 111.414,19.65 116.551,19.65 118.953,22.052 118.953,23.703 120.904,25.654 122.936,25.654 125.222,27.94 125.222,31.369 131.191,37.338 133.731,37.338 P4.7 P4.7@145.542,48.895
PC11_RXD3: P4.8 U2.52 | length 65.7
  Top Layer w0.3: v1(109.855,27.305) 110.236,27.305 111.597,28.666 U2.52
  Bottom Layer w0.3: v1(109.855,27.305) 109.855,20.193 110.952,19.096 116.78,19.096 119.507,21.823 119.507,23.368 121.239,25.1 123.165,25.1 125.776,27.711 125.776,30.907 131.491,36.622 134.412,36.622 144.399,46.609 145.542,46.609 P4.8
PC12: P9.9 U2.53 | length 86.5
  Top Layer w0.3: v1(111.506,27.305) 112.367,28.166 U2.53 ; v1(112.141,17.78) 112.522,18.161 v1(112.522,20.574) ; v1(116.713,5.207) 117.856,4.064 v1(127.635,4.064) ; P9.9 144.837,14.662 v1(144.907,14.732)
  Bottom Layer w0.3: v1(111.506,27.305) 111.379,27.178 111.379,21.717 v1(112.522,20.574) ; v1(112.141,17.78) 112.141,9.779 v1(116.713,5.207) ; v1(127.635,4.064) 129.794,4.064 131.907,1.951 131.907,-0.335 132.969,-1.397 148.844,-1.397 150.241,0 150.241,8.636 145.034,13.843 v1@145.034,14.605
PC13: P5.1 R21.1 U2.2 | length 91.1
  Top Layer w0.3: R21.1@101.981,39.052 v1(101.981,42.164) ; v1(112.903,44.069) v1(119.888,44.069) 122.809,46.99 150.923,46.99 P5.1 ; v1(115.062,21.463) 115.062,19.812 115.697,19.177 116.332,19.177 116.638,19.483 U2.2
  Bottom Layer w0.3: v1(101.981,42.164) 103.886,44.069 v1(112.903,44.069) ; v1(115.062,21.463) 115.062,22.479 119.899,27.316 122.248,27.316 122.809,27.877 122.809,30.967 118.618,35.158 118.618,42.799 v1(119.888,44.069)
PC14: C14.1 P5.2 U2.3 Y2.1 | length 81.1
  Top Layer w0.3: Y2.1 108.109,17.018 115.57,17.018 117.138,18.586 U2.3 117.138,22.816 v1@117.094,22.86 ; v1(121.666,44.577) 123.317,46.228 152.701,46.228 P5.2
  Bottom Layer w0.3: Y2.1 107.188,15.907 C14.1@107.188,14.541 ; v1(116.967,22.733) 116.967,23.368 120.361,26.762 122.477,26.762 123.444,27.729 123.444,31.115 119.253,35.306 119.253,42.164 v1(121.666,44.577) v1@121.793,44.704
PC15: C15.1 P5.3 U2.4 Y2.2 | length 80.6
  Top Layer w0.3: Y2.2 115.443,16.002 117.638,18.197 U2.4 117.638,22.261 v1(118.11,22.733) ; v1@123.19,44.831 123.825,45.466 154.479,45.466 P5.3
  Bottom Layer w0.3: C15.1@109.093,14.668 Y2.2 ; v1(118.11,22.733) 118.11,23.728 120.59,26.208 122.707,26.208 124.079,27.58 124.079,31.496 119.888,35.687 119.888,41.656 v1(122.936,44.704)
PD2: P9.2 R11.1 U2.54 | length 91.7
  Top Layer w0.3: v1(112.268,26.416) 112.268,27.051 112.883,27.666 U2.54 ; v1(113.411,17.78) 113.665,18.034 v1(113.665,21.59) ; v1(117.729,6.223) 118.999,4.953 v1(128.651,4.953) ; R11.1@137.795,21.653 138.367,22.225 v1(139.446,22.225) 139.583,22.362 P9.2
  Bottom Layer w0.3: v1(112.268,26.416) 112.268,25.527 113.665,24.13 v1(113.665,21.59) ; v1(113.411,17.78) 113.411,10.541 v1(117.729,6.223) ; v1(128.651,4.953) 130.048,4.953 132.715,2.286 132.715,-0.127 133.223,-0.635 148.59,-0.635 149.479,0.254 149.479,8.001 139.446,18.034 v1(139.446,22.225)
POWER: D5.2 F1.1 P6.1 P11.1 pad.0 | length 50.8
  Top Layer w0.3: pad.0 90.309,39.358 P11.1
  Top Layer w0.5: F1.1@100.076,4.826 103.124,1.778 D5.2
  Top Layer w2: P6.1 97.568,4.826 100.076,4.826 F1.1
  Bottom Layer w0.3: pad.0 90.17,39.243 90.424,38.989 90.424,31.369
  Bottom Layer w1: 90.424,31.369 90.424,30.607 87.757,27.94 87.757,14.637 P6.1
RESET: C9.2 P1.3 P8.5 R18.2 S2.1 U2.7 | length 116.5
  Top Layer w0.3: v1(85.852,43.307) 85.852,44.616 S2.1@86.034,44.798 ; U2.7 119.138,17.26 120.142,16.256 126.047,16.256 R18.2@127.381,14.922 ; v1(122.618,10.986) 124.015,12.383 126.492,12.383 127.572,13.462 R18.2@127.572,14.986
  Top Layer w0.5: S2.1@86.034,44.798 S2.1@86.034,50.198
  Bottom Layer w0.3: v1(85.852,43.307) 88.011,43.307 91.186,40.132 91.186,32.639 94.615,29.21 94.615,25.273 102.489,17.399 108.204,17.399 ; P8.5@111.379,33.782 P8.5 108.204,30.226 108.204,17.399 ; P1.3 117.348,2.54 116.268,3.619 ; v1@122.555,10.922 122.555,9.906 116.268,3.619 ; 108.204,17.399 109.601,17.399 110.744,16.256 110.744,9.144 116.268,3.619
VIN: D5.1 P1.8 | length 23.4
  Top Layer w0.5: D5.1 110.49,-1.27 128.143,-1.27 P1.8
pads on no net: P1.1 P9.1 P9.8 P9.10 S1.1@141.787,31.082 S1.2@145.487,31.082 Y2.3
copper on no net:
  other v2: 151.657,16.262 151.657,24.262

## Polygon pours and split planes (outlines as drawn)
no net on Top Layer "TopLayer-GND" (hatched 90Degree grid 0.508 track 1, remove dead copper, pour order 2): 491.691,-127.095
GND on Top Layer "Bottom Layer-No Net" (solid, remove dead copper, pour order 9): 82.804,52.959 82.677,52.832 82.677,-3.429 189.103,-3.429 190.119,-2.413 188.087,-0.381 188.087,53.975 83.947,53.975 82.55,52.578
GND on Bottom Layer "Bottom Layer-No Net" (solid, remove dead copper, pour order 7): 83.058,52.197 83.058,-3.429 82.677,-3.81 83.185,-4.318 190.754,-4.318 190.754,51.816 188.849,53.721 187.325,52.197 82.931,52.197

## Keep-outs
Keep-Out Layer:
  the board outline again, w0.127

## Other copper
Top Layer:
  rectangle net GND: 116.078,9.779 120.142,11.303

## Silkscreen, mask and mechanical layers (free items; w line width, h text height)
Top Overlay:
  lines w0.1: 111.633,36.195 111.633,35.306 ; 112.649,35.306 111.633,35.306 ; 113.816,36.774 113.101,36.774 111.633,35.306
  lines w0.2: 86.995,42.926 87.884,43.815 ; 87.376,43.942 88.011,43.942 88.011,43.307 ; 97.409,46.228 97.409,46.863 98.044,46.863 ; 97.536,46.736 98.425,45.847 ; 143.637,38.862 143.637,38.227 144.272,38.227 ; 143.764,38.354 144.653,39.243
  text "BOOT0" at 96.901,44.196 h2
  text "PB2" at 114.173,42.545 h1.5 r90
  text "PB3" at 116.713,42.545 h1.5 r90
  text "PB4" at 119.126,42.545 h1.5 r90
  text "PB5" at 121.412,42.545 h1.5 r90
  text "PB6" at 123.825,42.545 h1.5 r90
  text "PB7" at 126.746,42.545 h1.5 r90
  text "PB8" at 130.683,42.545 h1.5 r90
  text "PB9" at 133.35,42.545 h1.5 r90
  text "PC6" at 135.89,42.545 h1.5 r90
  text "PC7" at 138.43,42.545 h1.5 r90
  text "PC8" at 141.097,42.545 h1.5 r90
  text "PC9" at 143.637,42.545 h1.5 r90
  text "PC10" at 146.05,42.545 h1.5 r90
  text "PC11" at 148.463,42.545 h1.5 r90
  text "PC13" at 153.67,42.545 h1.5 r90
  text "PC14" at 156.21,42.545 h1.5 r90
  text "PC15" at 158.623,42.545 h1.5 r90
  text "PA8" at 161.163,42.545 h1.5 r90
  text "PA9" at 163.703,42.545 h1.5 r90
  text "PA10" at 166.243,42.545 h1.5 r90
  text "PA13" at 168.91,42.545 h1.5 r90
  text "PA14" at 171.577,42.545 h1.5 r90
  text "PA15" at 173.99,42.545 h1.5 r90
  text "PB13" at 176.403,42.545 h1.5 r90
  text "PB14" at 179.07,42.545 h1.5 r90
  text "PB15" at 181.61,42.545 h1.5 r90
  text "RESET" at 84.836,41.021 h1.5
  text "PB12/BTN1" at 144.907,39.751 h1.5
  text "LED3" at 106.172,37.592 h1 r90
  text "LED2" at 109.347,37.592 h1 r90
  text "LED1" at 112.141,37.592 h1 r90
  text "USART1" at 168.91,36.703 h1
  text "SWD" at 114.046,35.941 h1.5
  text "ISP" at 168.91,34.798 h1
  text "3.3V" at 159.766,31.877 h1 r90
  text "GND" at 167.259,31.75 h1 r90
  text "RST" at 110.998,30.861 h1
  text "POWER LED" at 91.567,30.734 h1
  text "GND" at 102.235,29.337 h1 r90
  text "3.3V" at 109.855,29.21 h1 r90
  text "PA9/TXD" at 162.433,28.067 h1 r90
  text "SWDIO" at 107.188,27.94 h1 r90
  text "SWCLK" at 104.648,27.559 h1 r90
  text "PA10/RXD" at 164.719,27.432 h1 r90
  text "蘑菇智能" at 162.56,18.288 h4
  text "www.moguzn.com" at 158.115,15.24 h2
  text "5V" at 88.646,11.303 h2
  text "jsDuino" at 163.449,11.176 h2.5
  text "PA7" at 155.956,2.413 h1.5 r90
  text "PB0" at 158.496,2.413 h1.5 r90
  text "RESET" at 117.729,2.286 h1.5 r90
  text "3.3V" at 120.65,2.286 h1.5 r90
  text "5V" at 123.19,2.286 h1.5 r90
  text "GND" at 125.603,2.286 h1.5 r90
  text "GND" at 128.143,2.286 h1.5 r90
  text "VIN" at 130.683,2.286 h1.5 r90
  text "PA0" at 135.763,2.286 h1.5 r90
  text "PA1" at 138.43,2.286 h1.5 r90
  text "PA2" at 140.843,2.286 h1.5 r90
  text "PA3" at 143.383,2.286 h1.5 r90
  text "PA4" at 145.796,2.286 h1.5 r90
  text "PA5" at 148.463,2.286 h1.5 r90
  text "PA6" at 153.416,2.286 h1.5 r90
  text "PB1" at 161.163,2.286 h1.5 r90
  text "PC0" at 163.576,2.286 h1.5 r90
  text "PC1" at 166.116,2.286 h1.5 r90
  text "PC2" at 168.783,2.286 h1.5 r90
  text "PC3" at 171.323,2.286 h1.5 r90
  text "PC4" at 173.736,2.286 h1.5 r90
  text "PC5" at 176.403,2.286 h1.5 r90
Bottom Overlay:
  text "USB" at 152.146,43.576 h1.5 r270
  text "PWM" at 134.366,42.926 h1.5 r270
  text "PWM" at 136.906,42.926 h1.5 r270
  text "PWM" at 139.446,42.926 h1.5 r270
  text "PWM" at 141.986,42.926 h1.5 r270
  text "LED1" at 167.513,42.926 h1.5 r270
  text "PB10" at 102.616,42.799 h1.5 r270
  text "PB11" at 104.902,42.672 h1.5 r270
  text "LED3" at 172.466,42.569 h1.5 r270
  text "LED2" at 169.926,42.545 h1.5 r270
  text "BOOT1" at 112.649,41.787 h1.5 r270
  text "OSC_RTC" at 154.559,38.448 h1.5 r270
  text "OSC_RTC" at 157.099,38.448 h1.5 r270
  text "PWM/UART1_RX" at 164.846,30.2 h1.5 r270
  text "PWM/USART1_TX" at 162.306,29.172 h1.5 r270
  text "PWM/USART1_SCK" at 159.639,27.879 h1.5 r270
  text "U3_TX/UART4_TX" at 144.526,27.651 h1.5 r270
  text "U3_RX/UART4_RX" at 147.32,27.265 h1.5 r270
  text "CAN/I2C1_SCL/PWM" at 129.286,25.958 h1.5 r270
  text "CAN/I2C1_SDA/PWM" at 131.826,25.637 h1.5 r270
  text "SDCARD/PWM/SPI2_SCK" at 175.006,21.323 h1.5 r270
  text "SDCARD/PWM/SPI2_MOSI" at 180.086,20.445 h1.5 r270
  text "SDCARD/PWM/SPI2_MISO" at 177.292,20.381 h1.5 r270
  text "PWM/SPI3_SCK/SPI1_SCK" at 115.062,19.738 h1.5 r270
  text "jsduinov2pcb" at 173.482,19.685 h1.5
  text "I2C1_SCL/PWM/USART1_TX" at 122.682,18.074 h1.5 r270
  text "PWM/SPI1_MOSI/SPI3_MOSI" at 120.015,17.896 h1.5 r270
  text "PWM/SPI1_MISO/SPI3_MISO" at 117.348,17.831 h1.5 r270
  text "I2C1_SDA/PWM/USART1_RX" at 125.222,17.56 h1.5 r270
  text "I2C2_SCL/PWM/USART3_TX" at 101.219,11.43 h1.5 r270
  text "I2C2_SDA/PWM/USART3_RX" at 103.505,10.922 h1.5 r270
  text "ADC/PWM" at 134.366,2.159 h1.5 r270
  text "ADC/PWM" at 137.033,2.159 h1.5 r270
  text "ADC/PWM/USART2_TX" at 139.573,2.159 h1.5 r270
  text "ADC/PWM/USART2_RX" at 142.24,2.159 h1.5 r270
  text "ADC/DAC/USART2_CK" at 144.653,2.159 h1.5 r270
  text "ADC/DAC/SPI1_SCK" at 147.193,2.159 h1.5 r270
  text "ADC/PWM/SPI1_MISO" at 152.146,2.159 h1.5 r270
  text "ADC/PWM/SPI1_MOSI" at 154.813,2.159 h1.5 r270
  text "ADC/PWM" at 157.226,2.159 h1.5 r270
  text "ADC/PWM" at 159.893,2.159 h1.5 r270
  text "ADC" at 162.56,2.159 h1.5 r270
  text "ADC" at 164.973,2.159 h1.5 r270
  text "ADC" at 167.386,2.159 h1.5 r270
  text "ADC" at 169.926,2.159 h1.5 r270
  text "ADC" at 172.593,2.159 h1.5 r270
  text "ADC" at 175.133,2.159 h1.5 r270
Mechanical 1:
  circle w0.127: c184.023,5.715 r1.6
  circle w0.127: c184.023,33.655 r1.6
  circle w0.127: c98.298,0.635 r1.6
  circle w0.127: c98.298,0.635 r1.6
  circle w0.127: c99.568,48.895 r1.6
  circle w0.127: c99.568,48.895 r1.6

## Text inside footprints (layer, text, board x,y; h text height)
P9: Top Overlay "TF CARD" at 146.228,17.374 h1 r90; Top Overlay "KINMOX" at 148.768,18.186 h1 r90